# Altium PCB candy-v1.0-product.PcbDoc (part 2 of 2)
Units mil, origin at the board's own origin, x right, y up, seen from the top; angles counter-clockwise.
Board outline 3100 x 1100 mil, 4 copper layers (Layer 1, Layer 2, Layer 3, Layer 4), stack 22.378 mil thick; 96 components, 103 nets, 428 pads, 133 vias.
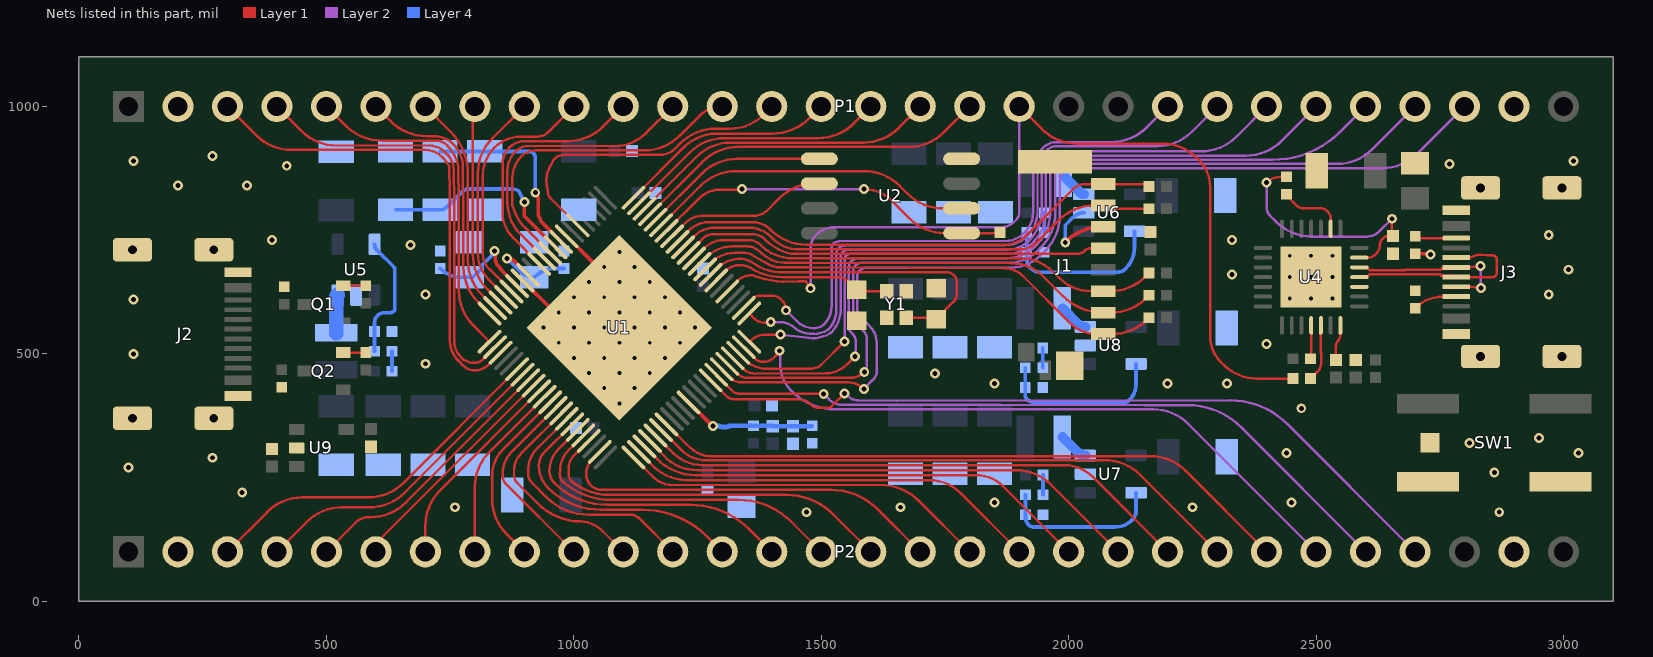
[diagram p4: the nets of this part, all layers, seen from the top]

## Via types
v1: diameter 20, hole 10, Layer 1 to Layer 4, tented both sides, 87 vias
v2: diameter 19.68, hole 7.87, Layer 1 to Layer 4, tented both sides, 45 vias
v3: diameter 24, hole 12, Layer 1 to Layer 4, tented both sides, 1 vias

## Nets (pads, with @x,y where several pads share a name; then routed paths per layer and width w, separated by ;. In a path a pad name is that pad's centre, name@x,y a point inside that pad or via, vN(x,y) a via of type N, cw(c..) or ccw(c..) an arc to the next point about the centre after c; other vN are vias at no path point) (continued)
CP2102_TXD: P1.19 R17.2 U1.49 | length 1919.1
  Layer 1 w5: U1.49@1310,626.15 1333.25,649.41 cw(c1355.63,627) 1355.5,658.67 ; 1355.54,658.67 cw(c1355.58,623.58) 1368.85,656.06 1368.96,656.01 1387.56,650.89 ccw(c1420.1,768.93) 1410.46,646.86 1421.52,646 1455,646.29 1468.28,646.29 1471.21,643.36 v1(1478.62,632.49) ; P1.19@1900,1000 1945.71,954.29 ccw(c2016.42,1025) 2016.42,925 2188.58,925 cw(c2188.58,825) 2259.29,895.71 2263,892 cw(c2207.47,836.47) 2286,836.47 2286,535 ccw(c2358.43,535) 2307.21,483.79 2312.99,478.01 ccw(c2380.6,545.6) 2380.61,450 ; 2380.64,450 R17.2@2453.28,450
  Layer 2 w5: v1(1478.62,632.49) 1479,648.35 1479,715.86 cw(c1513.14,715.86) 1489,740 cw(c1527.63,701.37) 1527.63,756 1864.86,756 ccw(c1864.86,790.14) 1889,766 1894.05,771.05 ccw(c1879.69,785.41) 1900,785.41 P1.19@1900,1000
DBGUSB_N: J3.A7 J3.B7 U4.5 | length 344.4
  Layer 1 w5: U4.5@2587.44,674.69 2602.76,674.69 2608.13,669.31 2680.02,669.31 2680.17,669.47 2750.93,669.47 2754.04,672.58 2781.04,672.58 J3.A7@2783.3,674.84 2812,674.84 ccw(c2812,679.84) 2812.71,674.89 2831.43,677.58 v1(2831.97,677.66) ; J3.B7@2783.3,635.47 cw(c2784.58,634.2) 2784.58,636 2813,636 cw(c2813,631) 2813.84,635.93 v1(2833,632.66)
  Layer 2 w5: v1(2831.97,677.66) 2831.97,677.56 2832.01,677.52 2832.99,657.91 cw(c2828,657.66) 2833,657.66 v1(2833,632.66)
DBGUSB_P: J3.A6 J3.B6 U4.4 | length 401.1
  Layer 1 w5: U4.4@2587.44,655 2602.76,655 2608.13,660.37 2683.72,660.37 2683.87,660.53 2750.52,660.53 2753.47,657.58 2780.88,657.58 J3.A6@2783.3,655.16 2847.91,655.16 2856.98,655.16 ccw(c2856.98,662.92) 2862.02,657.02 ccw(c2858.74,660.79) 2862.82,657.9 ccw(c2853.08,664.77) 2865,664.77 2865,682.39 2865,691.07 ccw(c2857.98,691.09) 2863,696 ccw(c2855.03,688.03) 2855.7,699.28 2849.41,699.52 2845.67,699.66 2832.82,700.14 ccw(c2831.97,677.66) 2829.6,700.03 2829.39,700.01 ccw(c2834.58,649) 2812.96,695.49 ; J3.B6@2783.3,694.53 2808.3,695.27 2810.02,695.27 2811.71,695.42 2812.23,695.42 2812.81,695.47 cw(c2813.33,690.5) 2812.92,695.48
FMINL: P1.10 U1.84 | length 509.5
  Layer 1 w5: U1.84@874.32,626.15 828.39,672.08 cw(c858.31,702) 816,702 816,859.06 cw(c897.94,859.06) 840,917 cw(c893.11,863.89) 893.11,939 927,939 ccw(c927,967.97) 947.49,947.49 P1.10@1000,1000
FMINR: P1.9 U1.85 | length 440.1
  Layer 1 w5: U1.85@863.19,615.02 827.78,650.43 cw(c880.35,703) 806,703 806,864.58 cw(c906,864.58) 835.29,935.29 P1.9@900,1000
GND: C1.2 C2.2 C3.2 C4.2 C5.2 C7.2 C9.2 C10.2 C11.2 C12.2 C13.2 C14.2 C15.2 C16.2 C17.2 C18.2 C19.2 C20.2 C21.2 C22.2 C23.2 C25.2 C26.2 C27.2 C28.2 C29.2 C30.2 C31.2 C32.2 C33.2 C34.2 C35.2 C36.2 C37.2 C38.2 C39.2 C40.2 C41.2 C42.2 C43.2 J1.G1 J1.G2 J1.P6 J2.0 J2.A1B12 J2.A12B1 J3.0 J3.A1B12 J3.A12B1 P1.2 P1.29 P2.2 P2.29 R2.1 R3.1 R5.2 R7.2 R8.2 R14.2 R15.2 R21.1 R24.1 R27.1 R30.1 SW1.1 SW1.B SW1.B' U1.74 U1.82 U1.89 U2.4 U4.3 U4.29 U5.2 U6.2 U7.2 U8.2 U9.2 Y1.2 Y1.4 | length 398
  Layer 1 w7.5: U1.82@896.59,648.42 955.41,589.61 ccw(c969.67,603.86) v2(969.67,583.7) ; U1.74@985.68,737.51 1037.78,685.41 ccw(c1061.54,709.17) v2(1061.54,675.57) ; v1(1993,725) 1995.25,727.25 cw(c2065.96,656.54) 2065.96,756.54 J1.P6@2070,756.54 ; R14.2@2700,702.28 2727.9,702.28 cw(c2727.9,697.9) v1(2731,701)
  Layer 4 w7.5: v1(1993,725) 1993,760 2008.94,775.94 cw(c2030.82,754.05) U6.2@2030.82,785
  other v1: 1470,180 2870,180 760,190 1660,190 2250,190 1850,200 2450,200 330,220 2860,260 100,270 270,290 2440,300 3030,300 2810,320 2950,330 2470,390 1850,440 2200,440 2320,440 1730,460 700,480 110,500 2400,520 110,610 700,620 2970,620 2330,660 3010,670 670,720 390,730 2330,730 2970,740 200,840 340,840 420,880 2769.5,883.5 110,890 3020,890 270,900
  other v2: 1092.16,399.96 1061.54,430.59 1122.78,430.59 1030.92,461.21 1092.16,461.21 1153.41,461.21 1000.29,491.83 1061.54,491.83 1122.78,491.83 1184.03,491.83 969.67,522.45 1030.92,522.45 1092.16,522.45 1153.41,522.45 1214.65,522.45 939.05,553.08 1000.29,553.08 1061.54,553.08 1122.78,553.08 1184.03,553.08 1245.27,553.08 1030.92,583.7 1092.16,583.7 1153.41,583.7 1214.65,583.7 2446.69,611.69 2490,611.69 2533.31,611.69 1000.29,614.32 1061.54,614.32 1122.78,614.32 1184.03,614.32 1030.92,644.95 1092.16,644.95 1153.41,644.95 2446.69,655 2490,655 2533.31,655 1122.78,675.57 2446.69,698.31 2490,698.31 2533.31,698.31 1092.16,706.19
HPCOM: P1.3 U1.3 | length 996
  Layer 1 w5: P1.3@300,1000 358.71,941.29 ccw(c429.42,1012) 429.42,912 700.2,912 cw(c700.2,864.2) 734,898 cw(c675.46,839.46) 747.5,880.26 cw(c743.12,877.84) 748.04,878.73 cw(c716.36,873.12) 748.54,873.12 748.54,868.69 ccw(c757.04,868.69) 748.54,868.55 749.11,834.15 749.5,810.68 cw(c744.5,810.56) 749.5,810.56 749.5,528.21 ccw(c809.21,528.21) 749.94,520.99 ccw(c809.21,528.21) 764.5,488.64 cw(c760.73,485.35) 764.72,488.37 765,488 766,487 cw(c762.49,483.44) 766.15,486.84 ccw(c809.21,528.21) 767.1,485.88 ccw(c797.14,516.14) 767.77,485.23 cw(c764.3,481.63) 767.86,485.14 776.38,476.62 ccw(c800.53,500.77) 800.53,466.62 801.15,466.62 801.24,466.62 ccw(c799.77,506.67) 801.34,466.62 ccw(c799.77,506.67) 828.11,478.33 U1.3@852.05,502.27
HPCOMFB: P1.4 U1.2 | length 879.2
  Layer 1 w5: P1.4@400,1000 449.71,950.29 ccw(c520.42,1021) 520.42,921 707.57,921 cw(c707.61,876.62) 739.04,907.96 745.12,901.88 cw(c716.36,873.12) 745.34,901.65 cw(c716.36,873.12) 757.04,873.12 757.04,868.69 758,810.71 cw(c753,810.64) 758,810.64 758,528.21 ccw(c809.21,528.21) 773,492 ccw(c797.14,516.14) 797.14,482 800,482 ccw(c800,504.96) 816.23,488.72 U1.2@840.92,513.41
HPL: P1.5 U1.1 | length 696.3
  Layer 1 w5: P1.5@500,1000 538.71,961.29 ccw(c611.84,1034.41) 611.84,931 720.17,931 ; 721.29,931 720.3,931 cw(c720.17,937.83) 720.25,931 cw(c720.17,937.83) 720.17,931 ; U1.1@829.78,524.54 796.29,558.03 cw(c864.59,626.33) 768,626.33 768,811.53 ccw(c763,811.53) 768,811.61 766.93,875.66 766.93,876.02 ccw(c684.62,862.92) 744.24,921.16 ccw(c720.49,897.41) 744.16,921.24 ccw(c720.49,897.41) 735.24,927.59 ccw(c733.07,923.08) 735,927.69 ccw(c715.96,881.96) 730.15,929.42 729.66,929.57 ccw(c715.96,881.96) 724.62,930.74 ccw(c723.75,925.81) 724.36,930.78 ccw(c720.49,897.41) 720.49,931 720.17,931
HPR: P1.6 U1.88 | length 546.3
  Layer 1 w5: P1.6@600,1000 630.71,969.29 ccw(c701.42,1040) 701.42,940 715.96,940 cw(c715.96,935) 716.27,939.99 722.66,939.59 cw(c721.81,926.11) 723.55,939.5 cw(c715.96,881.96) 731.99,937.74 732.62,937.56 cw(c715.96,881.96) 738,935.65 747.23,931.86 cw(c744,924) 750.02,930 757.03,922.97 cw(c711.13,877.13) 770.95,902.23 770.97,902.17 cw(c766.36,900.24) 771.05,901.97 cw(c667.24,864.81) 775.24,887.02 777,781.58 777,675.81 ccw(c877,675.81) 806.29,605.1 U1.88@829.78,581.61
LINL: P1.8 U1.86 | length 416.1
  Layer 1 w5: P1.8@800,1000 ccw(c809.66,990.34) 796,990.34 796,701.36 ccw(c896,701.36) 825.29,630.64 U1.86@852.05,603.88
LRADC0: P1.11 U1.79 | length 524.6
  Layer 1 w5: U1.79@930,681.83 877,734.83 877,735 cw(c927.7,785.7) 856,785.7 856,883.2 cw(c903.8,883.2) 870,917 cw(c901.38,885.62) 901.38,930 988.58,930 ccw(c988.58,1030) 1059.29,959.29 P1.11@1100,1000
MICIN: P1.7 U1.87 | length 456.2
  Layer 1 w5: P1.7@700,1000 751.17,948.82 ; 751.17,948.82 cw(c667.24,864.81) 786,864.8 ; 786,864.77 786,689.08 ccw(c886,689.08) 815.29,618.37 U1.87@840.92,592.75
NetC2_1: C2.1 U1.51 Y1.1 | length 370.7
  Layer 1 w5: U1.51@1287.73,648.42 1307.2,667.9 cw(c1334.17,640.98) 1328.2,678.61 cw(c1335.99,629.26) 1346.45,678.12 cw(c1339.02,643.46) 1358.38,673.15 ccw(c1420.1,768.93) 1422.05,655 1537.93,655 cw(c1537.93,637.93) 1550,650 1568.84,631.16 ccw(c1572,634.32) C2.1@1572,629.85 ccw(c1580.27,638.12) 1580.27,626.43 Y1.1@1632.32,626.43
NetC3_1: C3.1 U1.52 Y1.3 | length 677.7
  Layer 1 w5: U1.52@1276.59,659.56 1290.27,673.23 cw(c1335.78,627.99) 1333.19,692.11 cw(c1333.39,687.12) 1333.37,692.12 cw(c1333.31,638.35) 1357.41,686.41 cw(c1333.31,638.35) 1357.62,686.31 1367.51,680.13 ccw(c1420.58,765.13) 1424.43,665 1752.1,665 cw(c1752.1,641.1) 1769,658 cw(c1756.93,645.93) 1774,645.93 1774,621 cw(c1751.91,621) 1767.54,605.39 C3.1@1732,569.85 ccw(c1723.73,561.58) 1723.73,573.28 Y1.3@1671.68,573.28
NetC8_1: C8.1 C10.1 U1.75 | length 389.5
  Layer 1 w7.5: v1(922.18,825.6) 922.18,822.21 928,816.4 928,788 ccw(c964.42,788) 938.67,762.25 U1.75@974.54,726.37
  Layer 4 w7.5: C8.1@730,909.06 C10.1@820,909.06 909.38,909.06 cw(c909.46,896.34) 922.18,896.34 v1(922.18,825.6)
NetC8_2: C8.2 C9.1 U1.76 | length 408.2
  Layer 1 w7.5: v1(900,806.52) 900,778.64 915.1,763.54 U1.76@963.41,715.24
  Layer 4 w7.5: C9.1@640,790.94 C8.2@730,790.94 ccw(c730,810.13) 743.55,796.55 775,828 cw(c787.07,815.93) 787.07,833 874.27,833 cw(c874.27,802.27) 888.42,829.55 v1(900,806.52)
NetC24_1: C24.1 U4.28 | length 72.3
  Layer 1 w5: C24.1@2540,487.72 2540,516.34 cw(c2553.66,516.34) 2544,526 ccw(c2531.8,538.2) 2549.06,538.2 U4.28@2549.06,557.56
NetC25_1: C25.1 R16.1 U4.6 | length 512.6
  Layer 1 w5: v1(2400,846) cw(c2428.29,817.71) 2428.29,857.72 R16.1@2440,857.72 ; U4.6@2587.44,694.37 2603.38,694.37 ccw(c2603.41,719.23) 2620.99,701.65 ccw(c2601.64,721) 2629,721 ; 2629,721.04 cw(c2643.49,721) 2633.23,731.23 2637,735 cw(c2643.56,728.44) 2643.56,737.72 C25.1@2655,737.72 cw(c2659.83,742.54) 2653,742.54 v1(2653,773)
  Layer 2 w5: v1(2400,846) 2400,795.9 ccw(c2423.9,795.9) 2407,779 2418.71,767.29 ccw(c2491.84,840.41) 2491.84,737 2603,737 ccw(c2603,770.8) 2626.9,746.9 v1(2653,773)
NetJ3_A5: J3.A5 R15.1 | length 89.6
  Layer 1 w5: R15.1@2700,592.28 cw(c2756.74,535.54) 2756.74,615.79 J3.A5@2783.3,615.79
NetJ3_B5: J3.B5 R14.1 | length 84.3
  Layer 1 w5: R14.1@2700,737.72 ccw(c2709.22,746.94) 2709.22,733.9 J3.B5@2783.3,733.9
NetL1_1: L1.1 U5.3 | length 77.1
  Layer 4 w30: L1.1@520,542.4 520,612.55 cw(c528.87,612.55) U5.3@522.6,618.82
NetL2_1: L2.1 U6.3 | length 56.6
  Layer 4 w20: L2.1@1989.4,860 2024.3,825.1 ccw(c2030.82,831.62) U6.3@2030.82,822.4
NetL3_1: L3.1 U7.3 | length 61.1
  Layer 4 w20: L3.1@1987.4,332 2018.76,300.64 ccw(c2033.82,315.69) U7.3@2033.82,294.4
NetL4_1: L4.1 U8.3 | length 61.1
  Layer 4 w20: L4.1@1987.4,592 2018.76,560.64 ccw(c2033.82,575.69) U8.3@2033.82,554.4
NetQ1_2: Q1.2 R31.2 | length 46.1
  Layer 1 w5: Q1.2@533.82,637.5 579.6,637.5 R31.2@579.82,637.72
NetQ2_2: Q2.2 R32.2 | length 46.1
  Layer 1 w5: Q2.2@533.82,502.5 579.6,502.5 R32.2@579.82,502.72
NetR16_2: R16.2 U4.9 | length 133.8
  Layer 1 w5: R16.2@2440,822.28 ccw(c2445.51,822.28) 2441.61,818.39 2460,800 ccw(c2474.49,814.49) 2474.49,794 2508.51,794 cw(c2508.51,773.51) 2523,788 cw(c2507.62,772.62) 2529.37,772.62 U4.9@2529.37,752.44
NetR17_1: R17.1 U4.26 | length 115.5
  Layer 1 w5: R17.1@2488.72,450 2489,450 2503,464 ccw(c2486.1,480.9) 2509.65,476.85 ccw(c2499.54,479.17) 2509.91,478.86 ccw(c2486.1,480.9) 2510,480.9 2510,486 cw(c2514.92,486.91) 2509.92,486.87 2509.92,500.83 ccw(c2499.54,500.83) 2509.76,502.65 cw(c2514.68,503.49) 2509.69,503.46 U4.26@2509.68,557.56
NetR18_1: R18.1 U4.25 | length 67.9
  Layer 1 w5: R18.1@2488.72,490 ccw(c2485.62,493.1) 2490,493.1 U4.25@2490,557.56
NetR19_1: R19.1 R20.2 | length 40
  Layer 4 w7.5: R19.1@632.72,465 R20.2@632.72,505
NetR20_1: R20.1 R21.2 U5.5 | length 260.5
  Layer 4 w7.5: R20.1@597.28,505 R21.2@597.28,545 597.28,563.2 cw(c616.8,563.2) 603,577 cw(c617.49,562.51) 617.49,583 627.34,583 ccw(c627.34,596.66) 637,587 ccw(c634.59,589.41) 638,589.41 638,671.17 ccw(c631.17,671.17) 636.01,675.99 602.06,709.94 cw(c613.29,721.18) U5.5@597.4,721.18
NetR22_1: R22.1 R23.2 | length 40
  Layer 4 w7.5: R23.2@1950.72,745 R22.1@1950.72,785
NetR23_1: R23.1 R24.2 U6.5 | length 350.5
  Layer 4 w7.5: R23.1@1915.28,745 R24.2@1915.28,705 1915.28,691.63 ccw(c1941.63,691.63) 1923,673 ccw(c1942.31,692.31) 1942.31,665 2098.1,665 ccw(c2098.1,688.9) 2115,672 ccw(c2071.11,715.89) 2133.18,715.89 U6.5@2133.18,747.6
NetR25_1: R25.1 R26.2 | length 40
  Layer 4 w7.5: R26.2@1948,215 R25.1@1948,255
NetR26_1: R26.1 R27.2 U7.5 | length 333.9
  Layer 4 w7.5: R26.1@1912.57,215 R27.2@1912.57,175 1912.57,170.41 ccw(c1935,170.36) 1919.11,154.53 ccw(c1930,165.36) 1930,150 2092.79,150 ccw(c2092.79,201.21) 2129,165 ccw(c2111.66,182.34) 2136.18,182.34 U7.5@2136.18,219.6
NetR28_1: R28.1 R29.2 | length 40
  Layer 4 w7.5: R29.2@1947.72,472 R28.1@1947.72,512
NetR29_1: R29.1 R30.2 U8.5 | length 351.1
  Layer 4 w7.5: R29.1@1912.28,472 R30.2@1912.28,432 1912.28,416.97 ccw(c1924.97,416.97) 1916,408 1916.34,407.66 ccw(c1930,421.31) 1930,402 2110.93,402 ccw(c2110.93,419.07) 2123,407 ccw(c2091.18,438.82) 2136.18,438.82 U8.5@2136.18,479.6
PA0: P1.15 U1.66 | length 447.1
  Layer 1 w5: U1.66@1120.7,815.46 1222.95,917.71 cw(c1288.83,851.83) 1288.83,945 1400.75,945 ccw(c1400.75,1051.83) 1476.29,976.29 P1.15@1500,1000
PA1: P1.16 U1.65 | length 540.6
  Layer 1 w5: U1.65@1131.83,804.32 1234.22,906.71 cw(c1304.93,836) 1304.93,936 1494.58,936 ccw(c1494.58,1036) 1565.29,965.29 P1.16@1600,1000
PA2: P1.17 U1.64 | length 634.1
  Layer 1 w5: U1.64@1142.97,793.19 1247.49,897.71 cw(c1318.2,827) 1318.2,927 1585.58,927 ccw(c1585.58,1027) 1656.29,956.29 P1.17@1700,1000
PA3: P1.18 U1.63 | length 727.6
  Layer 1 w5: U1.63@1154.1,782.05 1260.76,888.71 cw(c1331.47,818) 1331.47,918 1676.58,918 ccw(c1676.58,1018) 1747.29,947.29 P1.18@1800,1000
PD0: P2.3 U1.6 | length 729.6
  Layer 1 w5: P2.3@300,100 380.71,180.71 cw(c451.42,110) 451.42,210 585.17,210 ccw(c585.17,310) 655.88,239.29 U1.6@885.46,468.86
PD1: P2.4 U1.7 | length 636.2
  Layer 1 w5: P2.4@400,100 460.71,160.71 cw(c531.42,90) 531.42,190 587.44,190 ccw(c587.44,290) 658.15,219.29 U1.7@896.59,457.73
PD2: P2.5 U1.8 | length 545.4
  Layer 1 w5: P2.5@500,100 559.39,159.39 cw(c585,133.79) 585,170 589.71,170 ccw(c589.71,270) 660.42,199.29 U1.8@907.73,446.59
PD3: P2.6 U1.9 | length 465.8
  Layer 1 w5: P2.6@600,100 cw(c640.06,100) P2.6@611.73,128.32 ; P2.6@611.73,128.33 U1.9@918.86,435.46
PD4: P2.7 U1.10 | length 415.3
  Layer 1 w5: P2.7@700,100 700,152.9 cw(c800,152.9) 729.29,223.61 U1.10@930,424.32
PD5: P2.8 U1.11 | length 367.3
  Layer 1 w5: P2.8@800,100 800,230.63 cw(c900,230.63) 829.29,301.34 U1.11@941.14,413.19
PD6: P2.9 U1.12 | length 370.2
  Layer 1 w5: P2.9@900,100 864.29,135.71 cw(c935,206.42) 835,206.42 835,255 cw(c906.9,255) 856.06,305.84 U1.12@952.27,402.05
PD7: P2.10 U1.13 | length 391.4
  Layer 1 w5: U1.13@963.41,390.92 874.48,301.99 ccw(c919,257.41) 856,257.41 856,252.59 ccw(c876.73,252.59) 862.11,237.89 P2.10@1000,100
PD8: P2.11 U1.14 | length 443.5
  Layer 1 w5: U1.14@974.54,379.78 894.28,299.52 ccw(c930.59,263.07) 879.14,263.01 879.14,254.89 ccw(c900.8,254.83) 885.52,239.48 928.23,196.77 ccw(c1014.64,284.55) 1013.67,161.38 ; 1013.7,161.38 cw(c1013.29,103.68) 1035.61,156.89 cw(c1008.01,91.09) 1058.55,141.45 P2.11@1100,100
PD9: P2.12 U1.15 | length 496.7
  Layer 1 w5: U1.15@985.68,368.64 939.29,322.26 925.45,308.42 ccw(c967.73,266.18) 908,268.16 908,257.61 ccw(c933.61,257.61) 915.5,239.5 944.21,210.79 ccw(c1030.54,297.02) 1030.54,175 1114.14,175 cw(c1114.14,148.79) 1132.68,167.32 P2.12@1200,100
PD10: P2.13 U1.16 | length 550.7
  Layer 1 w5: U1.16@996.81,357.51 940.58,301.28 ccw(c967.51,274.35) 929.43,274.42 ccw(c993.83,274.35) 948.28,228.82 948.35,228.74 ccw(c1054.07,334.62) 1054.07,185 1138.22,185 cw(c1138.22,-0.36) 1269.29,130.71 P2.13@1300,100
PD11: P2.14 U1.17 | length 613.9
  Layer 1 w5: U1.17@1007.95,346.37 969.32,307.75 ccw(c1013.88,263.14) 950.83,263.14 ccw(c984.57,263.15) 960.74,239.26 ccw(c1067.65,346.26) 1067.65,195 1235.29,195 cw(c1235.29,26.72) 1354.29,145.71 P2.14@1400,100
PD12: P2.15 U1.18 | length 680.1
  Layer 1 w5: 971.91,255.67 ccw(c990.53,255.44) 978.29,241.4 ccw(c1075.32,352.52) 1075.32,205 1332.36,205 cw(c1332.36,53.79) 1439.29,160.71 P2.15@1500,100 ; 971.91,255.77 972.17,265.03 cw(c1032.45,263.32) 989.87,306.03 U1.18@1019.08,335.24
PD13: P2.16 U1.19 | length 753.1
  Layer 1 w5: U1.19@1021.81,317.72 cw(c1025.33,314.17) 1022.05,317.95 U1.19@1023.06,316.94 ; U1.19@1030.22,324.1 U1.19@1023.06,316.94 ; P2.16@1600,100 1524.29,175.71 ccw(c1429.44,80.86) 1429.44,215 1071.37,215 cw(c1071.18,332.75) 995.54,242.5 cw(c1008.19,255.57) 990,255.57 990,272.07 cw(c1018.51,272.07) 998.35,292.23 1022.82,316.71 U1.19@1023.06,316.94
PD14: P2.17 U1.21 | length 793.9
  Layer 1 w5: U1.21@1052.49,301.83 1037.21,286.55 ccw(c1066.69,257.07) 1025,257.1 ccw(c1057.94,257.06) 1032.35,236.32 ccw(c1056.34,256.08) 1056.09,225 1520.15,225 cw(c1520.15,92.57) 1613.79,186.21 P2.17@1700,100
PD15: P2.18 U1.23 | length 751.2
  Layer 1 w5: U1.23@1120.7,290.7 1159.7,251.69 ccw(c1200,292) 1200,235 1620.49,235 cw(c1620.54,127.66) 1696.48,203.52 P2.18@1800,100
PD16: P2.19 U1.24 | length 843.9
  Layer 1 w5: U1.24@1131.83,301.83 1161.31,272.35 ccw(c1227.22,338.09) 1227.32,245 1718.12,245 cw(c1718.25,156.28) 1780.98,219.02 1781.1,218.9 P2.19@1900,100
PD17: P2.20 U1.25 | length 937.3
  Layer 1 w5: U1.25@1142.97,312.97 1168.87,287.06 ccw(c1246.15,364.17) 1246.25,255 1813.22,255 cw(c1813.26,178.38) 1867.49,232.51 P2.20@2000,100
PD18: P2.21 U1.26 | length 1031.2
  Layer 1 w5: U1.26@1154.1,324.1 U1.26@1154.18,324.03 ; U1.26@1154.16,324.01 ccw(c1266.96,402.3) 1160.16,316.01 1189.19,286.98 1189.35,286.83 ; 1189.35,286.83 ccw(c1249.29,358.24) 1249.47,265 1893.23,265 cw(c1893.28,164.27) 1964.55,235.45 P2.21@2100,100
PD19: P2.22 U1.27 | length 1125.1
  Layer 1 w5: U1.27@1165.24,335.24 1200.75,299.72 ccw(c1260.44,359.41) 1260.44,275 1991.25,275 cw(c1991.29,193.63) 2048.88,251.12 P2.22@2200,100
PD20: P2.23 U1.28 | length 1218.2
  Layer 1 w5: U1.28@1176.37,346.37 1216.31,306.43 ccw(c1268,358.04) 1268,285 2073.58,285 cw(c2073.58,185) 2144.29,255.71 P2.23@2300,100
PD21: P2.24 U1.29 | length 1312.2
  Layer 1 w5: U1.29@1187.51,357.51 1230.23,314.79 ccw(c1288.73,373.16) 1264.56,294.13 ccw(c1288.73,373.16) 1265,294 cw(c1264.48,289.03) 1265.05,293.99 1266.93,293.78 ccw(c1271.66,334) 1271.66,293.5 ; 1271.7,293.5 2165.08,293.5 cw(c2165.08,193.5) 2235.79,264.21 P2.24@2400,100
PE3: P1.22 U1.46 | length 1234.7
  Layer 1 w5: U1.46@1343.41,592.75 1365.72,615.06 cw(c1375.75,596.84) 1375.75,617.64 1400.01,617.85 cw(c1400.01,592.3) 1418.08,610.36 1420.99,607.44 cw(c1401.67,588.12) 1429,588.12 v1(1429,588)
  Layer 2 w5: v1@1435.83,585.17 ccw(c1429,578.34) v1(1429,588) 1451.57,565.43 ccw(c1484,597.87) 1484,552 1487.47,552 ccw(c1487.47,577.43) 1505.45,559.45 ccw(c1467.89,597) 1521,597 1521,714.76 cw(c1531.24,714.76) 1524,722 cw(c1538.49,707.51) 1538.49,728 1871.37,728 ccw(c1871.37,782.63) 1910,744 cw(c1913.59,740.51) 1910.15,744.14 ccw(c1871.2,784.8) 1910.98,744.96 ccw(c1868.79,787.21) 1928.46,784.98 ccw(c1868.79,787.21) 1928.5,787.21 1928.5,880.24 cw(c1967.76,880.24) 1940,908 1948.69,916.69 cw(c1976,889.37) 1976,928 2086.58,928 ccw(c2086.58,1028) 2157.29,957.29 P1.22@2200,1000
PE4: P1.23 U1.45 | length 1291.5
  Layer 1 w5: U1.45@1354.54,581.61 1361,575.15 1361,575 1364.51,571.49 ccw(c1385,591.97) 1385,563 1395.59,563 ccw(c1395.59,566.41) v1(1398,564)
  Layer 2 w5: v1(1398,564) 1416.57,564 cw(c1416.62,519.62) 1447.71,551.29 cw(c1416.62,519.62) 1447.76,551.24 ccw(c1451.21,554.86) 1448.34,550.76 ccw(c1482.57,600.39) 1513.45,548.61 1513.89,549.06 ccw(c1510.36,552.6) 1513.94,549.11 1514.55,549.72 ccw(c1475.09,588.66) 1530.52,588.66 1530.52,701.26 ; 1530.52,701.29 cw(c1547.69,701.29) 1535.55,713.43 cw(c1549,699.98) 1549.01,719 ; 1549.04,719 1861.65,719 ccw(c1861.65,792.45) 1869.96,719.47 cw(c1870.49,714.5) 1870.46,719.5 1871.37,719.5 ccw(c1871.37,782.63) 1916.03,738.01 ccw(c1871.2,784.8) 1916.95,738.91 ccw(c1868.79,787.21) 1937,787.21 1937,876.03 cw(c1977.97,876.03) 1948.22,904.2 cw(c1951.82,900.73) 1948.26,904.24 1954.66,910.64 cw(c1976,889.37) 1976,919.5 2178.08,919.5 ccw(c2178.08,1019.5) 2248.79,948.79 P1.23@2300,1000
PE5: P1.24 U1.44 | length 1389.9
  Layer 1 w5: U1.44@1354.54,524.54 cw(c1389.45,489.64) 1389.45,539 v1(1418,539) cw(c1422.83,543.83) v1@1416,543.83
  Layer 2 w5: v1(1418,539) 1474.2,532.11 ccw(c1482.57,600.39) 1518.4,541.67 ccw(c1513.98,548.93) 1519.9,542.83 1520.43,543.36 ccw(c1474.56,588.66) 1538.36,579.42 1539.02,584.02 1539.02,588.55 ccw(c1475.09,588.66) 1539.02,588.66 1539.02,695.1 cw(c1553.78,695.1) 1543.35,705.54 cw(c1555.32,693.56) 1555.32,710.5 1875.34,710.5 ccw(c1875.34,773.66) 1920,729 1922.72,731.72 ccw(c1919.17,735.24) 1923.48,732.71 1924.25,734.03 cw(c1928.57,731.51) 1924.89,734.9 ccw(c1868.79,787.21) 1945.5,787 ccw(c1868.79,787.21) 1945.5,787.21 1945.5,876.03 cw(c1977.97,876.03) 1954.33,898.29 1955.52,899.47 cw(c1979,875.98) 1979,909.2 2267.78,909.2 ccw(c2267.78,1009.2) 2338.49,938.49 P1.24@2400,1000
PE6: P2.25 U1.43 | length 1365.5
  Layer 1 w5: U1.43@1343.41,513.41 1366.06,490.75 ccw(c1382.93,507.62) 1382.93,483.76 ccw(c1382.93,514.74) 1404.83,492.83 1415.79,503.79 v1(1415.79,506.21)
  Layer 2 w5: v1(1415.79,506.21) 1417,490.36 1417,480.04 ; 1417,480.01 ccw(c1494.95,480) 1439.8,424.91 ccw(c1528.82,513.8) 1528.85,388 2170.58,388 cw(c2170.58,288) 2241.29,358.71 2256.34,343.66 P2.25@2500,100
PE7: P1.25 U1.42 | length 1561.3
  Layer 1 w5: U1.42@1332.27,502.27 1343.05,491.49 1351.7,482.84 U1.42@1351.94,482.6 ; U1.42@1351.97,482.57 ccw(c1391.65,536.56) 1391.66,469.56 1480.99,470.11 ccw(c1480.99,496.95) 1499.97,477.97 v1(1547,525)
  Layer 2 w5: v1(1547,525) 1547.52,525.52 1547.52,691.93 cw(c1555.78,691.93) 1549.94,697.77 cw(c1560.16,687.55) 1560.16,702 1875.34,702 ccw(c1875.34,773.66) 1926,722.98 1928.72,725.7 ccw(c1919.17,735.24) 1930.83,728.44 1931.4,729.41 ccw(c1879.24,781.57) 1951.45,766.54 ; 1951.46,766.58 ccw(c1868.79,787.21) 1954,787.21 1954,876.03 cw(c1977.97,876.03) 1957.11,887.84 cw(c1961.43,885.33) 1957.58,888.51 1962.23,894.08 cw(c1966.05,890.85) 1962.73,894.59 cw(c1979,875.98) 1963.57,895.29 cw(c1979,875.98) 1973.57,900.1 cw(c1974.64,895.21) 1973.98,900.17 1977.27,900.62 cw(c1977.98,895.67) 1977.69,900.67 cw(c1979,875.98) 1979,900.7 2359.28,900.7 ccw(c2359.28,1000.7) 2429.99,929.99 P1.25@2500,1000
PE8: P1.26 U1.41 | length 1694.7
  Layer 1 w5: U1.41@1321.14,491.14 1342.98,469.29 ccw(c1365.41,491.73) 1365.37,460 1508,460.6 ccw(c1508,522.41) 1551.7,478.7 v1(1568,495)
  Layer 2 w5: 1556.51,549.09 cw(c1561.02,551.25) 1556.02,551.22 1556.02,677.32 cw(c1567.95,677.32) 1559.52,685.75 1560.24,686.47 cw(c1576,670.71) 1576,693 1793,693.5 1875.34,693.5 ccw(c1875.34,773.66) 1932,716.96 1934.7,719.66 ccw(c1919.17,735.24) 1935.28,720.26 cw(c1938.92,716.83) 1935.39,720.37 1937,722 ccw(c1876.64,782.36) 1961.64,774.52 cw(c1966.62,774.03) 1961.66,774.66 ccw(c1868.79,787.21) 1962.5,787.21 1962.5,869.27 cw(c1984.42,869.27) 1968.92,884.77 cw(c1986.57,867.12) 1986.57,892.08 1990.82,892.08 ; 1556.53,549.05 ccw(c1578.94,560) 1561.3,542.37 cw(c1547,525) 1569.5,525 1569.5,496.5 v1(1568,495) ; 1991,892.2 2411.7,892.2 ; 2411.73,892.2 ccw(c2411.82,1086.24) 2549,949 P1.26@2600,1000
PE9: P1.27 U1.40 | length 1839
  Layer 1 w5: U1.40@1310,480 1328.81,461.19 ccw(c1352.72,485.11) 1352.72,451.29 1395.97,451.29 ; 1396,451.29 1543,451.45 1559.12,451.45 ccw(c1559.12,490.88) v1(1587,463)
  Layer 2 w5: v1(1587,463) ccw(c1575.17,474.83) 1591.9,474.83 1591.9,528.93 ccw(c1564.93,528.93) 1584,548 cw(c1632.28,596.28) 1564.56,587.55 cw(c1569.52,588.16) 1564.52,588.13 1564.52,668.33 cw(c1577.66,668.33) 1568.37,677.62 1569.63,678.87 cw(c1582,666.5) 1582,684 1879.06,684 ccw(c1879.06,765.94) 1937,708 1943.71,714.71 ccw(c1873,785.42) 1973,785.42 1973,861.5 cw(c1993.49,861.5) 1979,875.98 cw(c1998.35,856.63) 1993.95,883.64 cw(c1994.7,878.7) 1994.67,883.7 2542.28,883.7 ccw(c2542.28,983.7) 2612.99,912.99 P1.27@2700,1000
PE10: P1.28 U1.39 | length 1983.3
  Layer 1 w5: U1.39@1299.64,468.86 U1.39@1298.86,468.86 1316.27,451.46 ccw(c1337.61,472.81) 1337.61,442.62 1553.12,442.62 cw(c1553.12,396.12) v1(1586,429)
  Layer 2 w5: v1(1586,429) 1604.93,447.93 ccw(c1587.86,465) 1612,465 1612,522.2 ccw(c1564.2,522.2) 1598,556 1575.95,578.05 cw(c1579.52,581.55) 1574.71,580.17 cw(c1632.28,596.28) 1573.02,588.39 1573.02,657.13 cw(c1588.86,657.13) 1577.66,668.33 cw(c1591.35,654.64) 1591.35,674 1882.64,674 ccw(c1882.64,759.36) 1943,699 1952.71,708.71 ccw(c1882,779.42) 1982,779.42 1982,856.09 cw(c1997.61,856.09) 1986.57,867.12 1991.4,871.95 cw(c1999.25,864.1) 1998.87,875.2 cw(c1999.01,870.2) 1998.98,875.2 2633.78,875.2 ccw(c2633.78,975.2) 2704.49,904.49 P1.28@2800,1000
PE11: P2.26 U1.38 | length 1451.1
  Layer 1 w5: U1.38@1287.73,457.73 1319.31,426.15 ccw(c1336.44,443.11) 1336.53,419 v1(1505,419)
  Layer 2 w5: v1(1505,419) 1516.39,407.61 ccw(c1542,433.21) 1542,397 1861.62,397 2152.83,396.5 2240.86,396.5 cw(c2240.86,245.29) 2347.79,352.21 P2.26@2600,100
PE12: P2.27 U1.37 | length 1578.4
  Layer 1 w5: U1.37@1276.59,446.59 1307.9,415.29 ccw(c1325.37,432.59) 1325.4,408 ; 1325.43,408 1453.61,408 cw(c1453.61,370.86) 1479.99,397.01 ccw(c1494.55,411.63) 1494.6,391 1513.36,391 ccw(c1513.41,402.09) 1521.27,394.27 v1(1547,420)
  Layer 2 w5: v1(1547,420) 1561.9,408.63 ccw(c1564.92,412.61) 1563.19,407.92 ccw(c1574,437.39) 1574,406 ; 1574.04,406 1651.95,405.5 ccw(c1652,414) 1652.01,405.5 2326.77,406 cw(c2326.73,243.6) 2441.96,358.04 P2.27@2700,100
SDC0_CLK: J1.P5 U1.56 | length 866.5
  Layer 1 w5: U1.56@1232.05,704.1 1260.95,733 1261,733 cw(c1282.73,711.27) 1282.73,742 1359.44,742 cw(c1359.54,702.67) 1387.37,730.46 ccw(c1464.34,807.47) 1422.69,706.87 ccw(c1447.2,766.1) 1447.21,702 2018,702 ccw(c2018,721.31) 2031.66,707.66 2032,708 cw(c2044.62,695.38) 2044.62,713.23 J1.P5@2070,713.23
SDC0_CMD: J1.P3 R9.1 U1.55 | length 972.3
  Layer 1 w5: U1.55@1243.19,692.97 1264.11,713.89 cw(c1303,675) 1303,730 1351.79,730 cw(c1351.79,691.62) 1378.89,718.79 ccw(c1440.12,779.95) 1407.04,699.98 ccw(c1442.19,784.96) 1442.21,693 ; 1442.24,693 1902.67,693 ; 1902.71,693 cw(c1902.67,600.47) 1968.1,665.9 1980.17,653.83 ccw(c2045.87,719.53) 2045.87,626.61 J1.P3@2070,626.61 2084.33,626.61 ccw(c2084.33,726.61) 2155.04,655.9 R9.1@2162.28,663.15
SDC0_D0: J1.P7 R10.1 U1.57 | length 1000.1
  Layer 1 w5: U1.57@1220.92,715.24 1243.74,738.06 cw(c1284.57,697.31) 1284.65,755 ; 1284.68,755 1353.56,755 cw(c1353.74,691.52) 1398.98,736.05 cw(c1395.39,732.56) 1399.13,735.89 ccw(c1455.5,786.94) 1424.53,717.48 1424.76,717.38 ccw(c1455.07,786.21) 1455.14,711 1903.65,711 ccw(c1903.62,752.96) 1933.29,723.29 1980.55,770.55 cw(c2051.26,699.84) 2051.26,799.84 J1.P7@2070,799.84 ccw(c2086.16,816) 2086.16,793.15 R10.1@2162.28,793.15
SDC0_D1: J1.P8 R11.1 U1.58 | length 1026.6
  Layer 1 w5: U1.58@1209.78,726.37 1230.13,746.72 cw(c1272.32,710.19) 1272.33,766 1361.96,766 cw(c1361.96,717) 1396.58,751.68 ccw(c1473.75,828.78) 1432.06,727.97 ccw(c1468.19,815.36) 1468.2,720.8 ; 1468.23,720.8 1502.47,720.8 1866.35,720.04 ; 1866.39,720.04 ccw(c1866.4,791.61) 1917,741 2009.2,833.2 cw(c2033.16,809.33) 2009.26,833.26 cw(c2033.16,809.33) 2033.16,843.15 J1.P8@2070,843.15 2150.21,843.15 cw(c2150.21,826.08) R11.1@2162.28,838.15
SDC0_D2: J1.P1 R12.1 U1.53 | length 973.7
  Layer 1 w5: U1.53@1265.46,670.7 1287.16,692.4 cw(c1325.54,634.72) 1325.54,704 1344.96,704 cw(c1344.96,673.74) 1360,700 1396.54,679.14 cw(c1394.08,674.79) 1396.61,679.11 ccw(c1429.05,766.74) 1397.01,678.96 ccw(c1429.05,766.74) 1409.34,675.4 1436.95,675.4 1479,675 1869,673 cw(c1869,617.47) 1908.26,656.74 2002,563 ccw(c2057.53,618.53) 2057.53,540 J1.P1@2070,540 2087.71,540 ccw(c2087.71,640) 2158.42,569.29 R12.1@2162.28,573.15
SDC0_D3: J1.P2 R13.1 U1.54 | length 971
  Layer 1 w5: U1.54@1254.32,681.83 1267.8,695.31 cw(c1320.17,642.93) 1320.17,717 1352,717 cw(c1352,689.69) 1362.46,714.92 cw(c1341.45,664.21) 1380.29,702.99 ccw(c1426.18,748.94) 1426.18,684 1478.97,684 1884.9,683 cw(c1884.9,593.44) 1948.22,656.78 1987.53,617.47 ccw(c2070,699.93) J1.P2@2070,583.31 2086.02,583.31 ccw(c2086.02,683.31) 2156.73,612.6 R13.1@2162.28,618.15
SPI0_CLK: U1.59 U2.6 | length 333.7
  Layer 1 w5: U1.59@1198.64,737.51 1226.09,764.95 cw(c1260,731.04) 1260,779 1363.03,779 ccw(c1363.03,819.97) 1392,791 1416,815 cw(c1486.01,744.99) 1486.01,844 U2.6@1496.3,844
SPI0_CS: R6.1 U1.60 U2.1 | length 735.2
  Layer 1 w5: U1.60@1187.51,748.64 1253.09,814.23 cw(c1296,771.32) 1296,832 1337.59,832 ccw(c1337.59,835.41) v1(1340,833) ; v1(1586,833) cw(c1586,753.33) 1642.33,809.67 1678.71,773.29 ccw(c1749.42,844) 1749.42,744 U2.1@1783.7,744 1857.9,744 ccw(c1857.9,748.38) R6.1@1861,745.28
  Layer 2 w5: v1(1340,833) v1(1586,833)
SPI0_MISO: U1.61 U2.2 | length 670.7
  Layer 1 w5: U1.61@1176.37,759.78 1256.3,839.71 cw(c1327.01,769) 1327.01,869 1587.58,869 cw(c1587.58,769) 1658.29,839.71 1674.71,823.29 ccw(c1745.42,894) 1745.42,794 U2.2@1783.7,794
SPI0_MOSI: U1.62 U2.5 | length 377.7
  Layer 1 w5: U1.62@1165.24,770.92 1259.03,864.71 cw(c1329.74,794) 1329.74,894 U2.5@1496.3,894
SVREF: C6.2 C7.1 R4.2 R5.1 U1.33 | length 263.7
  Layer 1 w7.5: U1.33@1232.05,402.05 1280.1,354 v1(1281,354)
  Layer 4 w7.5: R5.1@1479.59,353.72 ccw(c1479.59,357.13) R5.1@1482,354.72
  Layer 4 w10: v1(1281,354) 1292.38,354 cw(c1292.34,344) 1295.64,353.44 ccw(c1304,377) 1312.4,353.45 cw(c1315.76,344.03) 1315.6,354.03 R4.2@1355.84,354.77 ; R4.2@1363,354.72 1399.59,354.72 cw(c1399.59,351.3) C6.2@1402,353.72 C7.1@1443,353.72 R5.1@1479.59,353.72
TVN0: P1.12 U1.78 | length 598
  Layer 1 w5: U1.78@941.14,692.97 892.29,741.81 cw(c955.76,805.28) 866,805.28 866,870.37 cw(c920.63,870.37) 882,909 cw(c908.56,882.44) 908.56,920 1081.94,919.5 ccw(c1081.94,1010.19) 1146.06,946.06 P1.12@1200,1000
TVN1: P1.13 U1.77 | length 667.1
  Layer 1 w5: U1.77@952.27,704.1 902.37,754 902,754 cw(c967.18,819.18) 883.62,780.27 cw(c1042.45,854.24) 876,799.52 876,855.57 cw(c937.46,855.54) 894,899 cw(c922.97,870.03) 922.97,911 1142.58,911 ccw(c1142.58,1011) 1213.29,940.29 1253.91,980.91 cw(c1300,934.82) P1.13@1300,1000
TVOUT: P1.14 U1.72 | length 634
  Layer 1 w5: 961,894 ccw(c964.56,890.48) 960.22,892.97 952.65,879.77 ccw(c1004.7,849.93) 945.18,842.39 946.96,828.32 cw(c942,827.66) 946.97,828.26 947,828 ccw(c964.59,828.01) 952.23,815.5 U1.72@1007.95,759.78 ; 961.03,894.03 cw(c980.31,874.69) 980.31,902 1173.62,902 ccw(c1173.62,946.38) 1205,915 1215.71,925.71 cw(c1286.42,855) 1286.42,955 1316,955 ccw(c1316,1049.15) 1382.58,982.58 P1.14@1400,1000
VRA1: C5.1 R3.2 U1.81 | length 192.9
  Layer 1 w7.5: v1@867.39,690.61 v1(865,693) cw(c865,670.57) 880.86,686.43 U1.81@907.73,659.56
  Layer 4 w7.5: v1(865,693) 891.72,666.28 ccw(c920,694.56) C5.1@920,654.57 cw(c962.77,611.8) 962.77,672.28 R3.2@980,672.28
VRA2: C4.1 R2.2 U1.83 | length 230
  Layer 1 w7.5: v1(840,708) ccw(c900.97,708) 841.16,696.15 cw(c833.8,694.73) 841.29,694.35 ccw(c865,693) 849.26,675.21 cw(c844.27,669.61) 850.47,673.84 ccw(c900.97,708) 857.82,664.93 U1.83@885.46,637.29
  Layer 4 w7.5: R2.2@730,672.28 ccw(c772.77,715.05) 772.77,654.57 795.91,654.57 814.79,673.45 814.79,679.36 837.61,702.18 837.61,705.61 v1(840,708)
pads on no net: J1.G3 J1.G4 J2.A8 J2.B8 J3.A8 J3.B8 U4.1 U4.2 U4.10 U4.11 U4.12 U4.13 U4.14 U4.15 U4.16 U4.17 U4.18 U4.19 U4.20 U4.21 U4.22 U4.23 U4.24 U4.27 U9.4

## Polygon pours and split planes (outlines as drawn)
3V3 on Layer 3 "3V3_L03_P000" (solid, pour order 0): 50,1050 50,50 3050,50 3050,1050
GND on Layer 1 "GND_L01_P001" (solid, pour order 1): 50,1050 50,50 3050,50 3050,1050
GND on Layer 4 "GND_L04_P002" (solid, pour order 2): 50,1050 50,50 3050,50 3050,1050

## Silkscreen, mask and mechanical layers (free items; w line width, h text height)
Top Overlay:
  text "EXW" at 390,700 h220
  text "b" at 1420,400 h160
  text "Candy F1C100s v1.0" at 1319,287 h120
  text "Designed in Germany by OtakuNekoP" at 1371,216 h60
Bottom Overlay:
  lines w6: 2570,190 2750,190 2750,900 2570,900 2570,220 2570,190
  text "WARNING: This product contains a chemical known to the State of California to cause cancer. For more information, go to www.P65Warnings.ca.gov." at 2575,200 h40 r270
Mechanical 1:
  the board outline again, w10